# Altium PCB STM32_PCB_Design.PcbDoc
Units mm, origin at the board's own origin, x right, y up, seen from the top; angles counter-clockwise.
Board outline 36 x 36 mm, 4 copper layers (L1 (Signal), L2 (GND), L3 (GND), L4 (Signal)), stack 1.57 mm thick; 35 components, 27 nets, 170 pads, 68 vias.
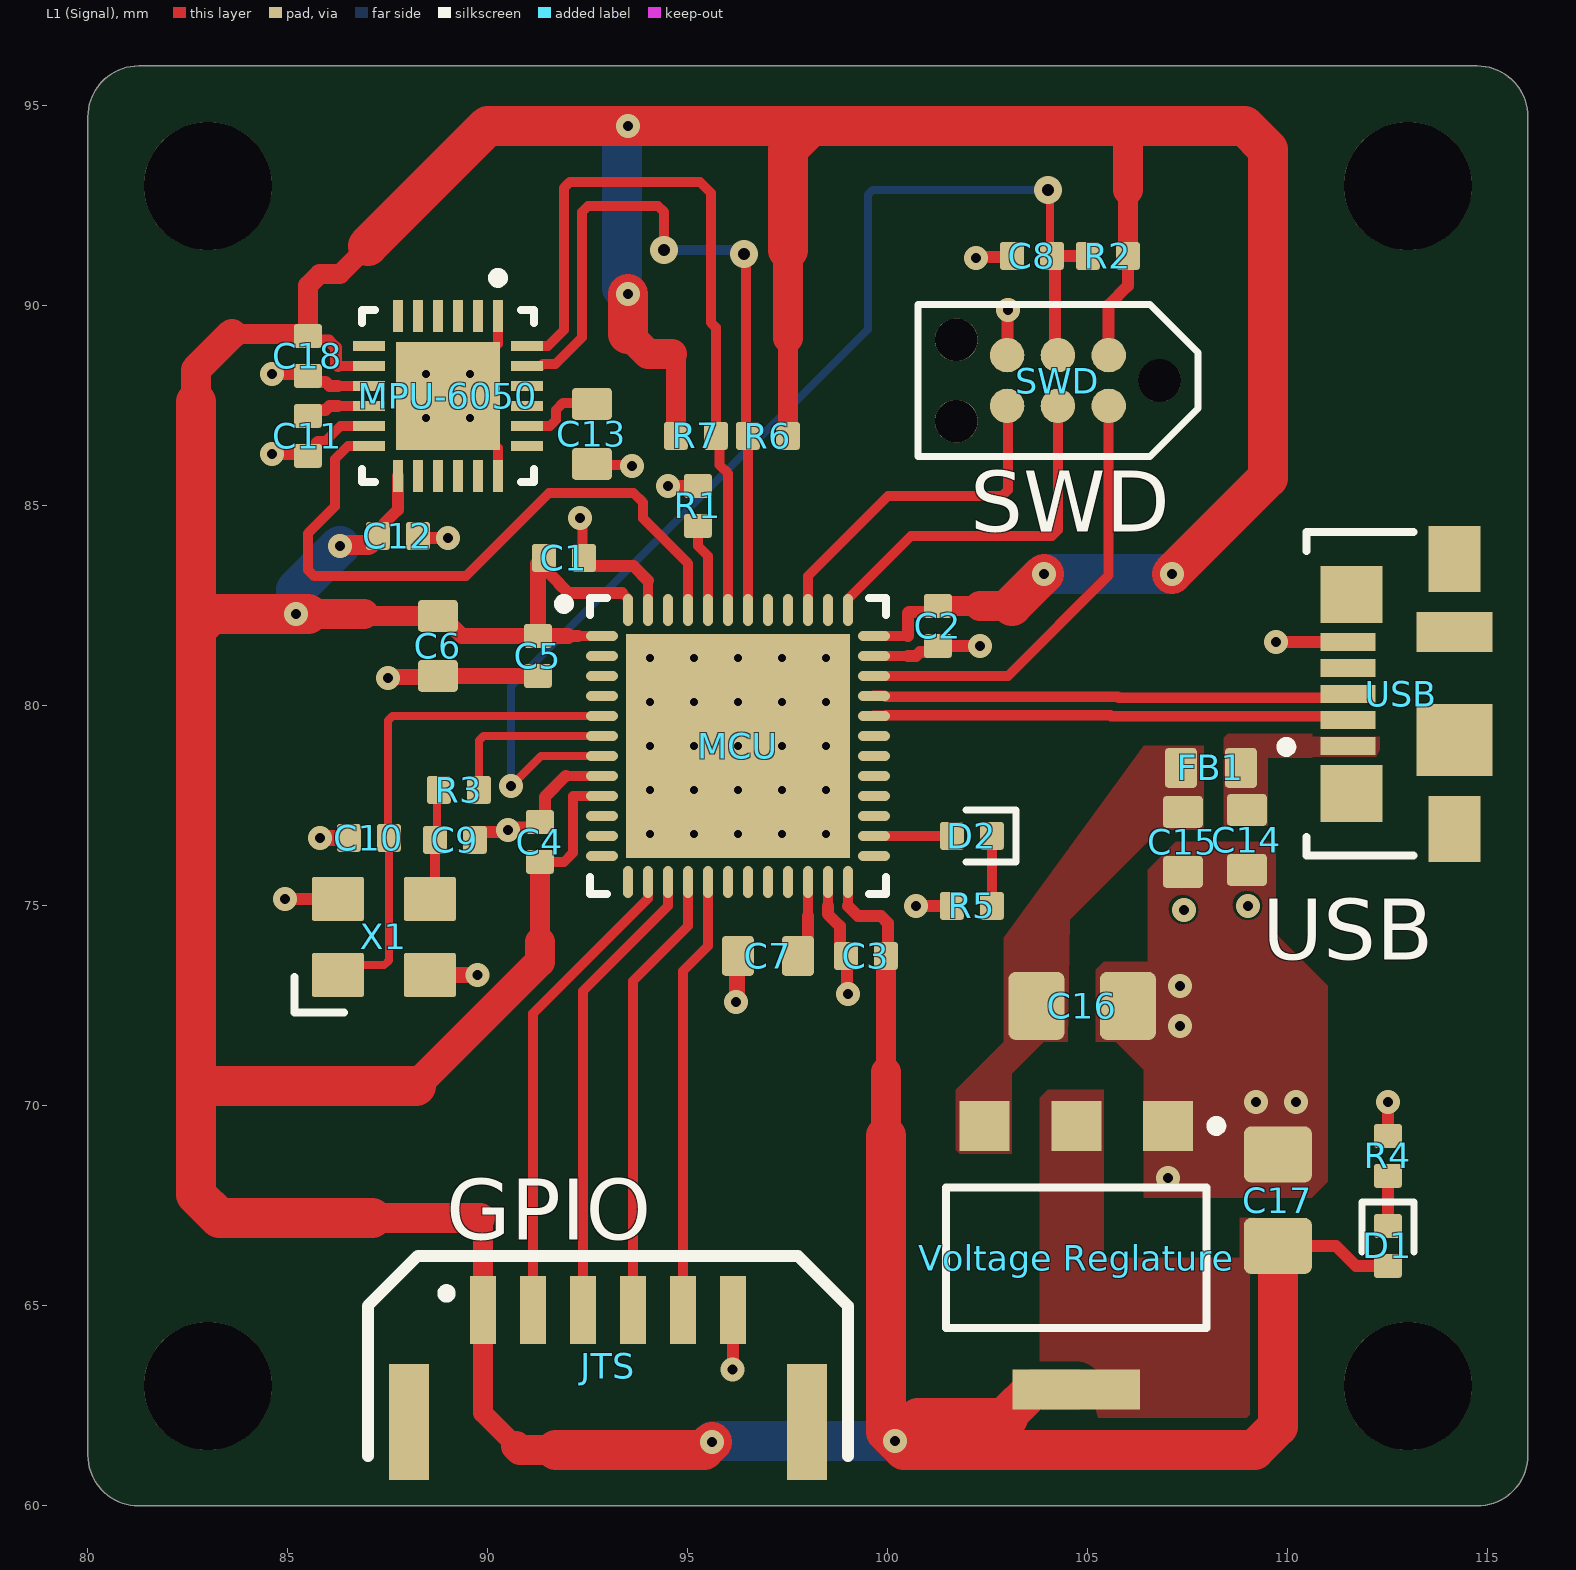
[diagram p0: L1 (Signal) view]
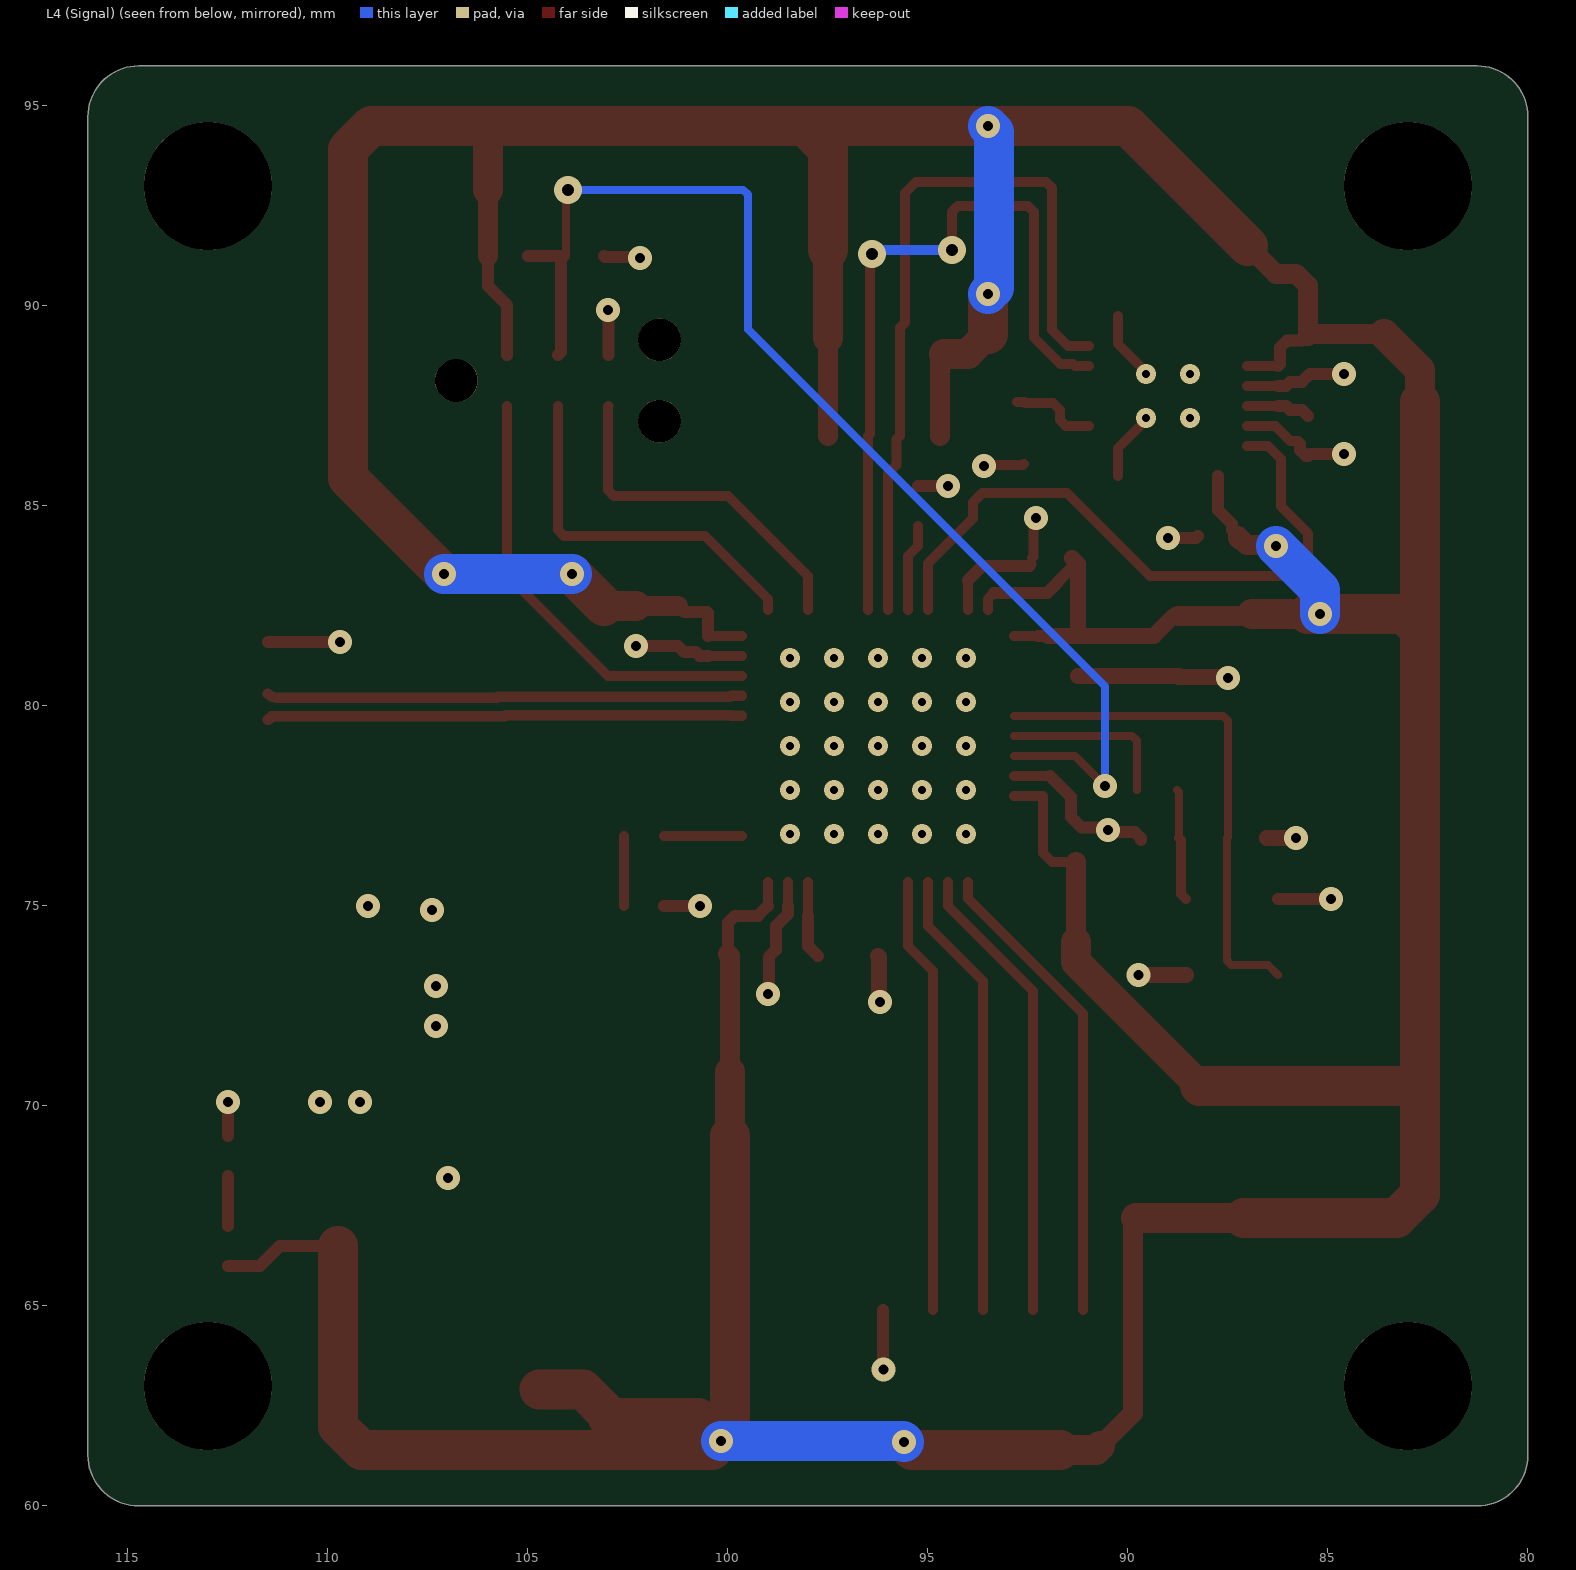
[diagram p1: L4 (Signal) view, seen from below]
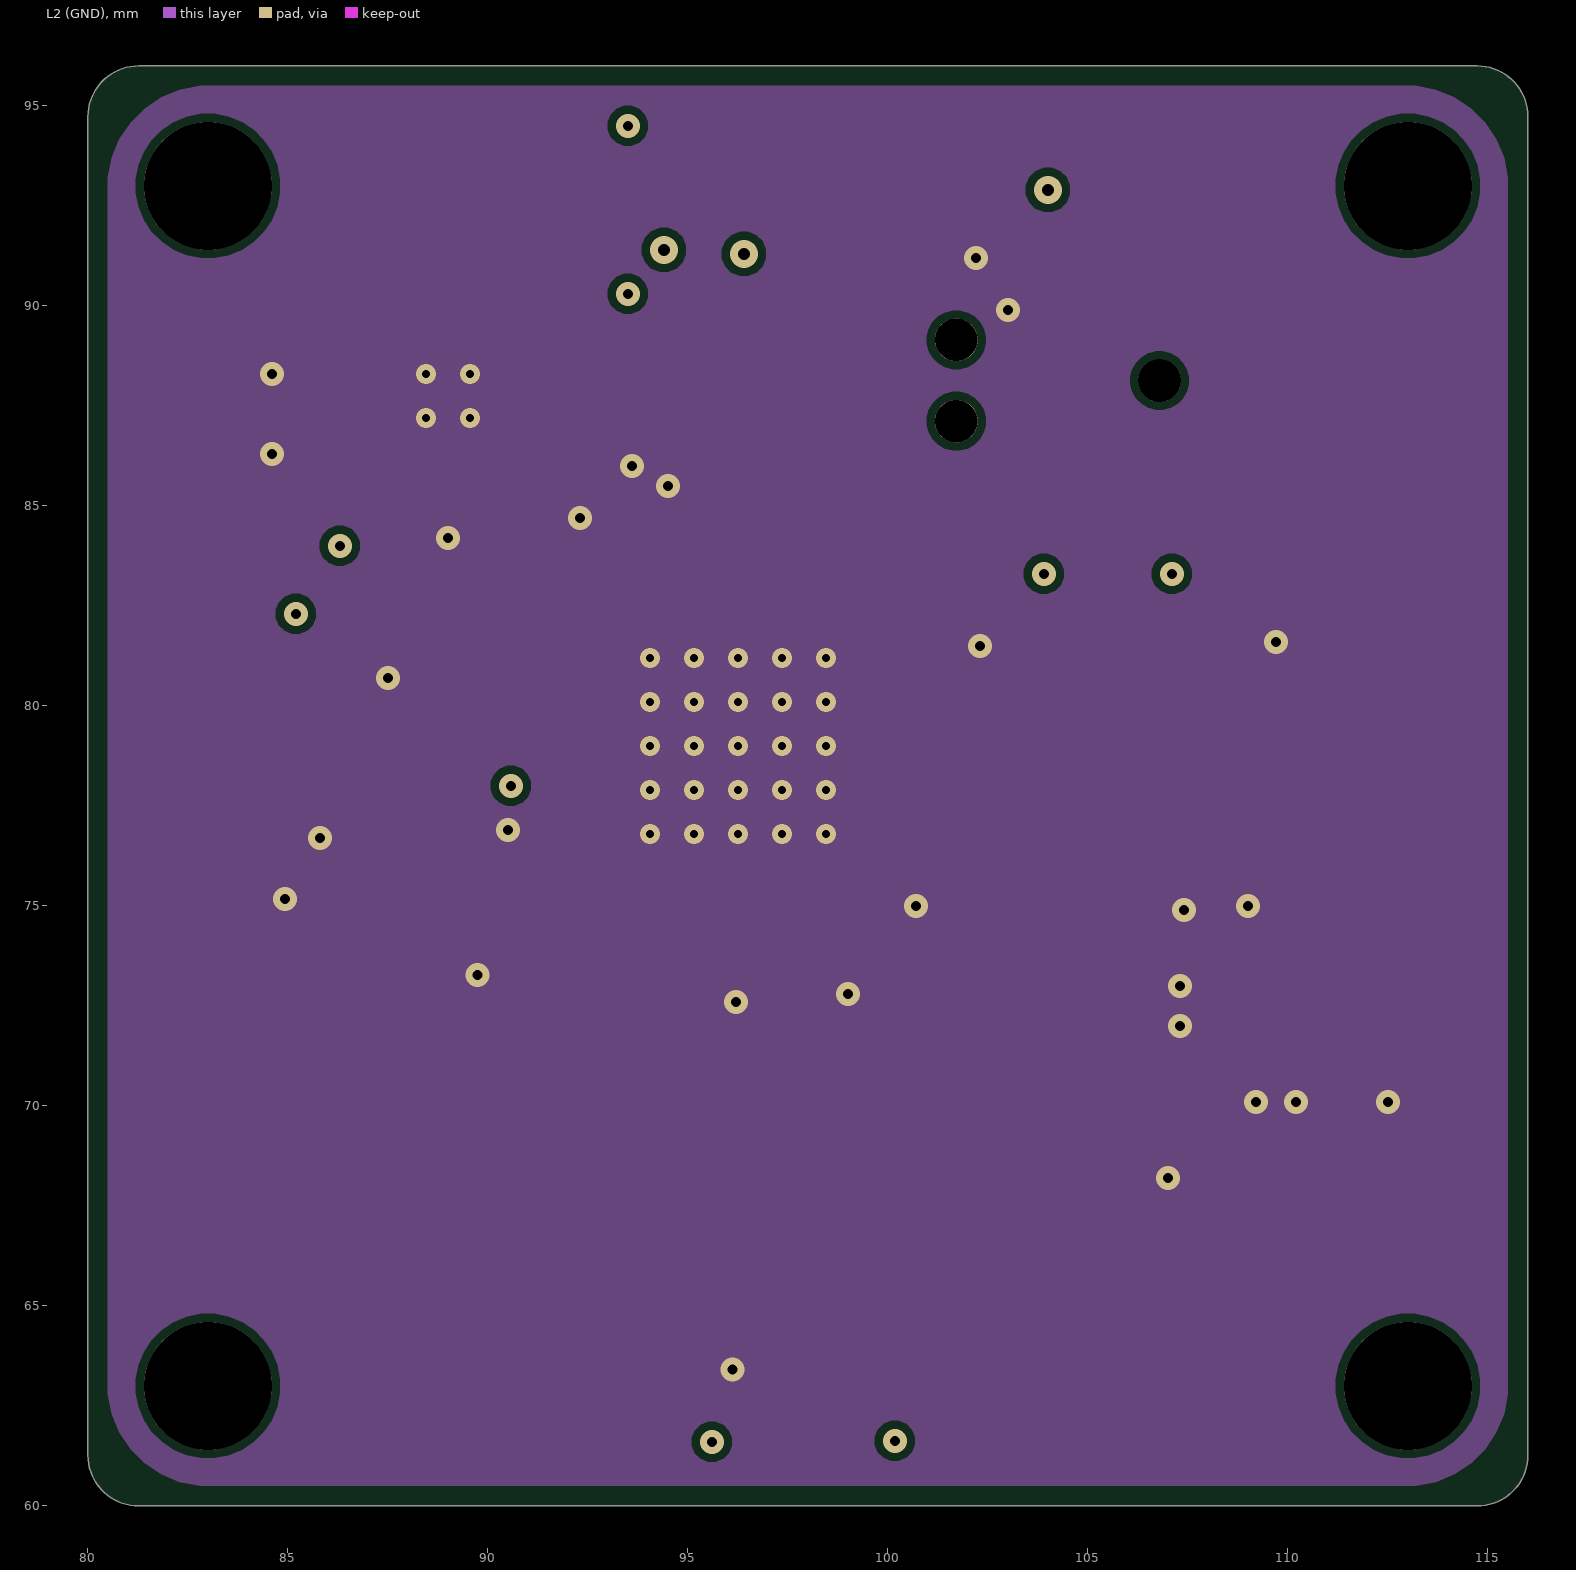
[diagram p2: L2 (GND)]
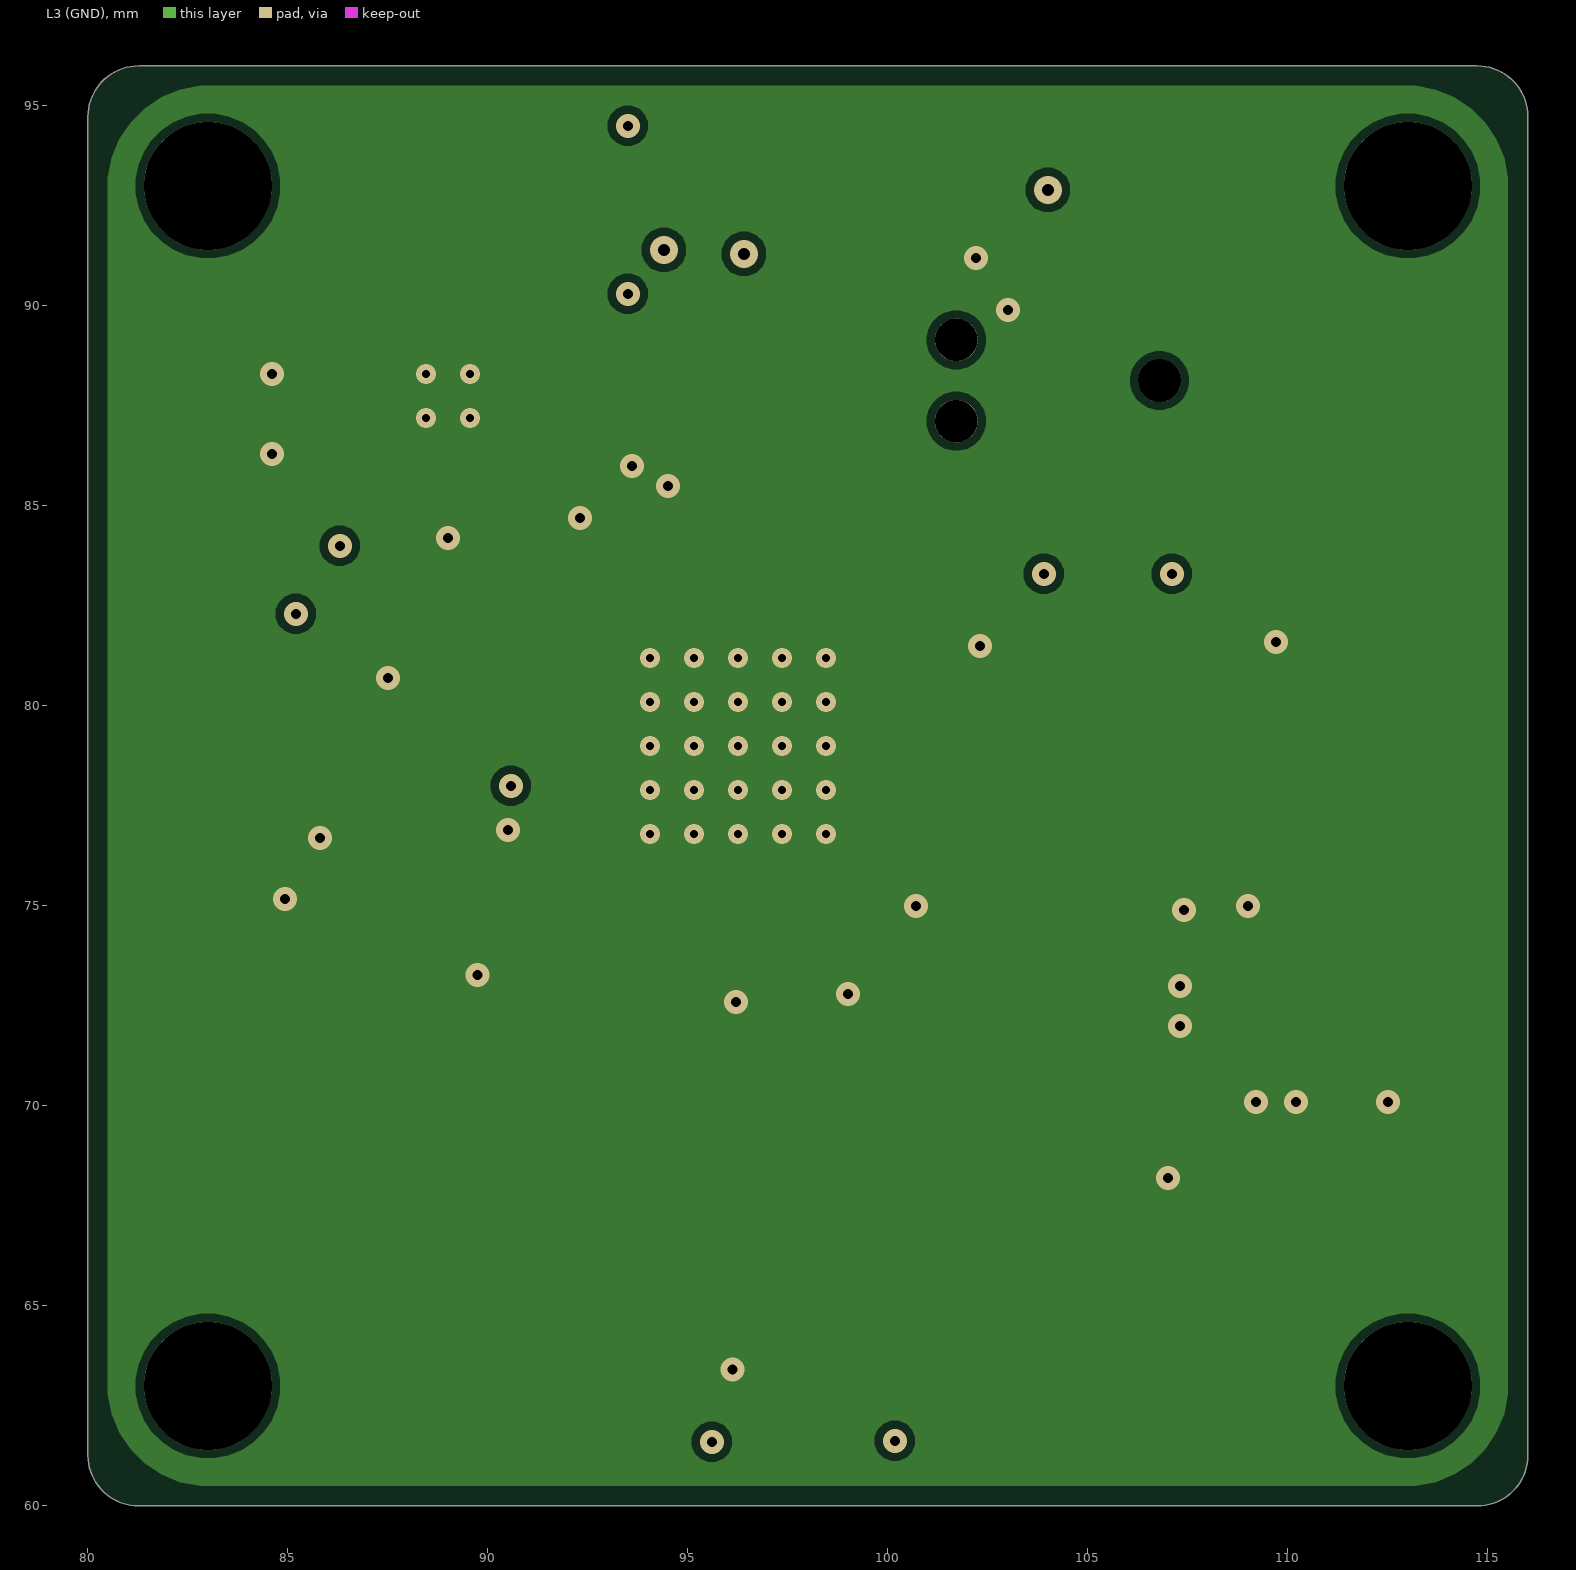
[diagram p3: L3 (GND)]
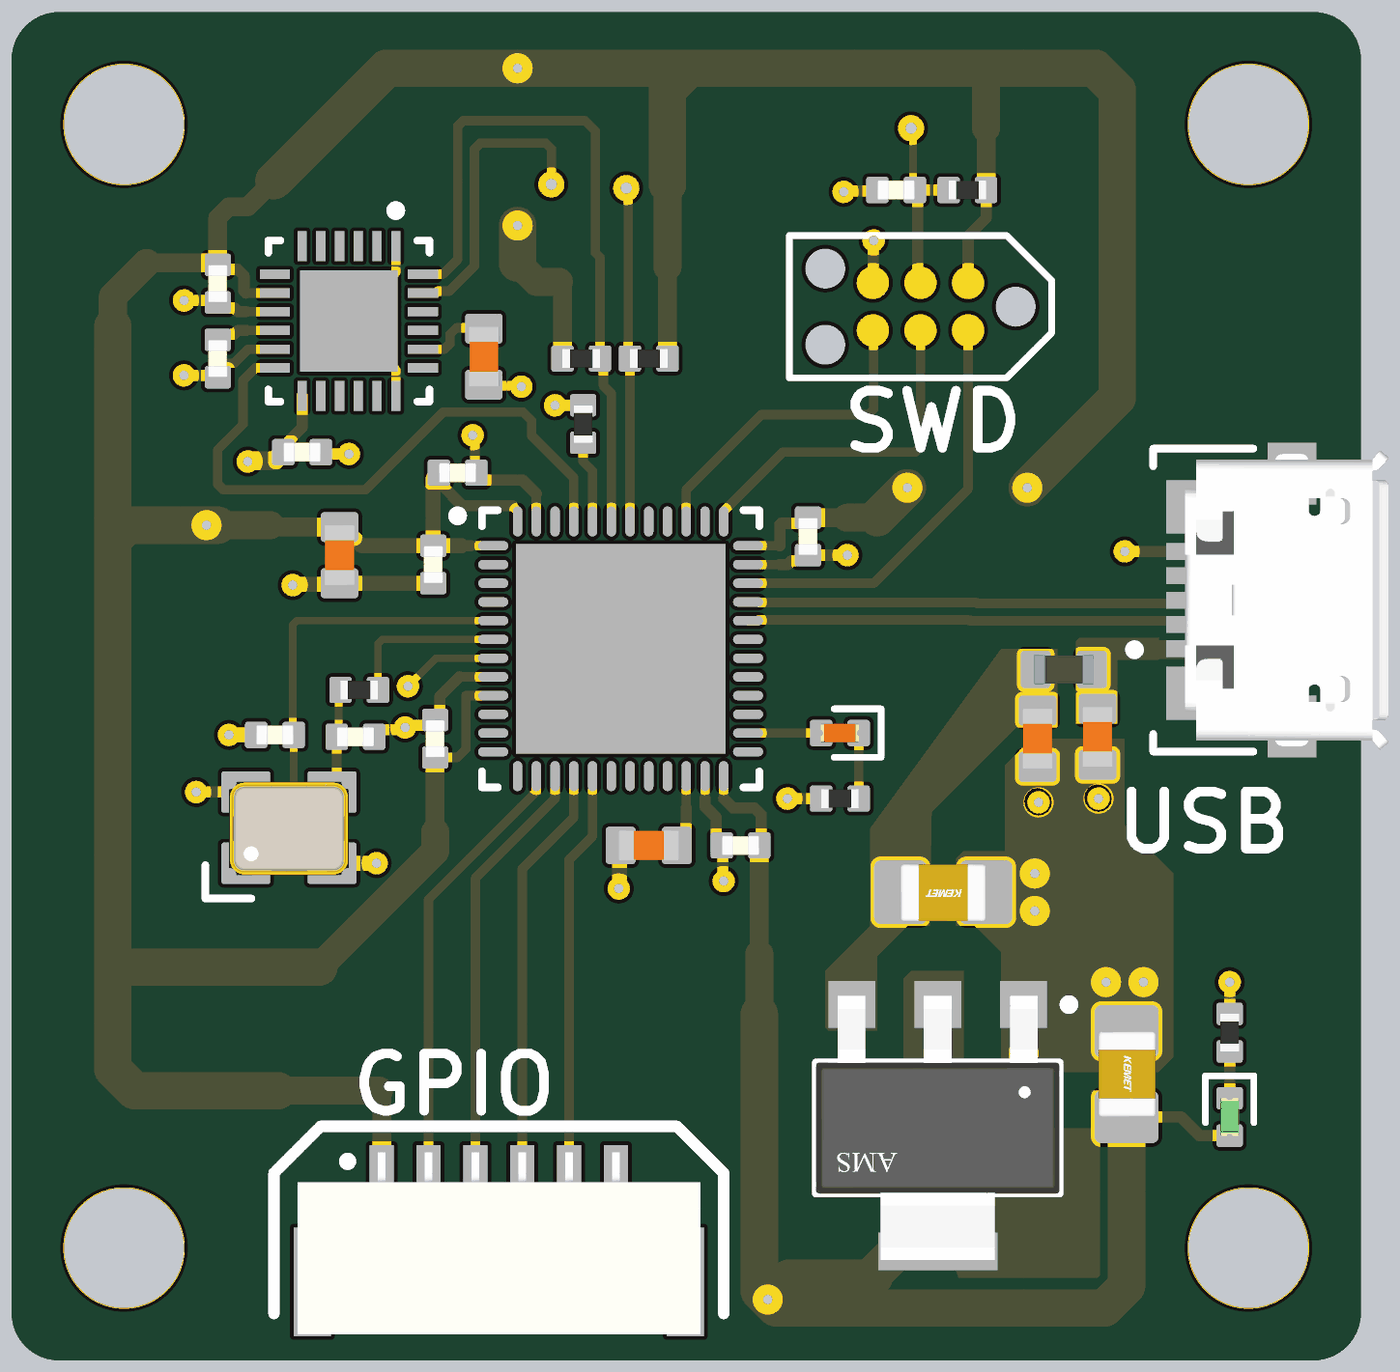
[diagram p4: 3D render of the assembled board from above, using the file's embedded part models]

## Layer stack, top to bottom
Top Solder: solder mask 0.0254, SM-001, Dk 4
L1 (Signal): signal copper 0.035
Dielectric 1: prepreg 0.2, PP-017, Dk 4.6
L2 (GND): signal copper 0.0175
Dielectric 3: core 1.065, Core-039, Dk 4.6
L3 (GND): signal copper 0.0175
Dielectric 5: prepreg 0.2, PP-017, Dk 4.6
L4 (Signal): signal copper 0.035
Bottom Solder: solder mask 0.0254, SM-001, Dk 4

## Board outline
80,61.27 ccw(c81.27,61.27) 81.27,60 114.73,60 ccw(c114.73,61.27) 116,61.27 116,94.73 ccw(c114.73,94.73) 114.73,96 81.27,96 ccw(c81.27,94.73) 80,94.73

## Design rules (kind name [scope] priority, off if disabled: settings)
Clearance [All] p1: gap=0.2 ignorepadtopadclearanceinfootprint=FALSE
DiffPairsRouting [All] p1: maxlimit=0.254 minlimit=0.203 mostfreqgap=0.254 toplayer_maxgap=0.203 toplayer_prefgap=0.203 toplayer_minwidth=0.26 toplayer_maxwidth=0.26 toplayer_prefwidth=0.26 bottomlayer_maxgap=0.203 bottomlayer_prefgap=0.203 bottomlayer_minwidth=0.26 bottomlayer_maxwidth=0.26 bottomlayer_prefwidth=0.26 impedanceprofiledriven=TRUE impedanceprofileid={0C0DE32C-D66B-4248-AC4A-00D76F28ABD3} impedanceprofilevalue=90.000000 maxuncoupledlength=12.7
PolygonConnect [All] p1: connectstyle=Direct reliefconductorwidth=0.254 reliefentries=4 polygonreliefangle="90 Angle" airgapwidth=0.254
RoutingVias [All] p1: holewidth=0.3 width=0.7 viastyle="Through Hole" minholewidth=0.25 minwidth=0.55 maxholewidth=0.4 maxwidth=0.9
SolderMaskExpansion [All] p1: expansion=0.102 istentingtop=FALSE
SupplyNets "Schematic Supply Nets_3" [InNet('+3V3')] p1: voltage=0.000
SupplyNets "Schematic Supply Nets_2" [InNet('GND')] p2: voltage=0.000
SupplyNets "Schematic Supply Nets_1" [InNet('VBUS')] p3: voltage=0.000
SupplyNets "Schematic Supply Nets" [InNet('+5')] p4: voltage=0.000
UnRoutedNet [All] p1: checkbadconnections=TRUE
Width [All] p1: maxlimit=1 minlimit=0.2 preferedwidth=0.3 midlayer1_minwidth=0.254 midlayer1_maxwidth=0.254 midlayer1_prefwidth=0.254 midlayer2_minwidth=0.254 midlayer2_maxwidth=0.254 midlayer2_prefwidth=0.254 minimp=50.000000 maximp=50.000000 favimp=50.000000
28 further rules are at their usual default settings.

## Classes and differential pairs
differential pair class DIFF_USB: USB_D
differential pair USB_D: +USB_D_P -USB_D_N

## Components (designator, comment, footprint, x,y, rotation, side; value= is the part's Value field where it differs from the comment)
C1 "100n" CAP_0402 91.9,83.7 r180 top
C2 "100n" CAP_0402 101.25,82 r90 top
C3 "100n" CAP_0402 99.45,73.75 r0 top
C4 "100n" CAP_0402 91.3,76.6 r270 top
C5 "100n" CAP_0402 91.25,81.25 r90 top
C6 "2.2u" CAP_0603 88.75,81.5 r90 top
C7 "2.2u" CAP_0603 97,73.75 r0 top
C8 "100n" CAP_0402 103.6,91.25 r0 top
C9 "10P" CAP_0402 89.175,76.65 r180 top
C10 "10P" CAP_0402 87.025,76.7 r0 top
C11 "100n" CAP_0402 85.5,86.75 r90 top
C12 "100n" CAP_0402 87.75,84.25 r180 top
C13 "2.2u" CAP_0603 92.6,86.8 r90 top
C14 "2.2u" CAP_0603 108.975,76.65 r90 top
C15 "2.2u" CAP_0603 107.375,76.6 r90 top
C16 "22uf" CAP_0805 104.857,72.5 r180 top
C17 "22uf" CAP_0805 109.75,67.643 r270 top
C18 "100n" CAP_0402 85.5,88.75 r90 top
D1 "GREEN" LED_0402_GREEN 112.5,66.5 r90 top
D2 "RED" LED_0402_RED 102.1,76.75 r0 top
FB1 "120R" FB_0603 108.075,78.45 r180 top
JTS "SM06B-GHS-TB" SM06B-GHS-TB 93,63.5 r0 top
MCU "STM32F411CEU6" STM-UFQFPN48_L 96.25,79 r0 top
MPU-6050 "MPU-6050" IS-QFN-24_V 89,87.75 r270 top
R1 "10K" RES_0402 95.25,85 r270 top
R2 "10K" RES_0402 105.5,91.25 r0 top
R3 "0R" RES_0402 89.275,77.9 r0 top
R4 "1K" RES_0402 112.5,68.75 r270 top
R5 "1K" RES_0402 102.1,75 r0 top
R6 "2K2" RES_0402 97,86.75 r0 top
R7 "2K2" RES_0402 95.2,86.75 r180 top
SWD "TC2030-NL" TC2030-NL-FP 104.25,88.135 r180 top
USB "473460001" FP-473460001-MFG 113.81,80.3 r90 top
"Voltage Reglature" "AMS1117-3.3" FP-AMS1117-IPC_C 104.71,66.205 r270 top
X1 "24MHz" XTAL_3225 87.4,74.225 r0 top

## Footprints (in the part's own frame and the unit in brackets; to place one, negate y for a bottom-side part, rotate by r counter-clockwise, add the part's x,y. Pads: shape width x height; smd on the part's side, far side on the other; paste and mask are expansions set on the pad)
CAP_0402 [mm]
  rrect25% 0.6x0.7 smd: 1(-0.5,0) 2(0.5,0)
  body extent -0.5,-0.26 0.5,0.26, height 0.37
CAP_0603 [mm]
  rrect25% 0.8x1 smd: 1(-0.75,0) 2(0.75,0)
  body extent -0.8,-0.4 0.8,0.4, height 0.51
CAP_0805 [mm]
  rrect25% 1.4x1.7 smd: 1(-1.143,0) 2(1.143,0)
  body extent -1.15,-0.76 1.15,0.79, height 1.01
FB_0603 [mm]
  rrect25% 0.8x1 smd: 1(-0.75,0) 2(0.75,0)
  body extent -0.8,-0.4 0.8,0.4, height 0.81
FP-473460001-MFG [mm]
  rect 0.45x1.38 smd paste+0 mask+0: 1(-1.3,2.31) 2(-0.65,2.31) 3(0,2.31) 4(0.65,2.31) 5(1.3,2.31)
  rect 1.425x1.55 smd paste+0 mask+0: 6(-2.488,2.225) 7(2.488,2.225)
  rect 1.65x1.3 smd paste+0 mask+0: 8(-3.375,-0.35) 11(3.375,-0.35)
  rect 1.8x1.9 smd paste+0 mask+0: 9(-1.15,-0.35)
  rect 1x1.9 smd paste+0 mask+0: 10(1.55,-0.35)
  silkscreen extent -4.05,0.67 4.05,3.97, body extent -4.3,-2.48 4.3,3.45, height 0.25
FP-AMS1117-IPC_C [mm]
  rect 1.25x1.25 smd paste+0 mask+0: 1(-3.295,2.29) 2(-3.295,0) 3(-3.295,-2.29)
  rect 1.004x3.182 smd paste+0 mask+0: 4(3.295,0)
  silkscreen extent -3.42,-3.25 1.75,3.63, body extent -3.9,-3.35 3.9,3.35, height 0.25
IS-QFN-24_V [mm] "QFN, 24-Leads, Body 4x4mm, Pitch 0.5mm, Thermal Pad 2.7x2.6mm"
  rect 0.8x0.25 smd: 1(-2,1.25) 2(-2,0.75) 3(-2,0.25) 4(-2,-0.25) 5(-2,-0.75) 6(-2,-1.25) 13(2,-1.25) 14(2,-0.75) 15(2,-0.25) 16(2,0.25) 17(2,0.75) 18(2,1.25)
  rect 0.25x0.8 smd mask+0.102: 7(-1.25,-1.975) 8(-0.75,-1.975) 9(-0.25,-1.975) 10(0.25,-1.975) 11(0.75,-1.975) 12(1.25,-1.975) 19(1.25,1.975) 20(0.75,1.975) 21(0.25,1.975) 22(-0.25,1.975) 23(-0.75,1.975) 24(-1.25,1.975)
  rect 2.7x2.6 smd: 25(0,0)
  silkscreen extent -3.07,-2.15 2.15,2.15, body extent -2,-2 2,2, height 0.95
LED_0402_GREEN [mm]
  rrect25% 0.6x0.7 smd: A(-0.5,0) K(0.5,0)
  silkscreen extent -0.15,-0.65 1.1,0.65, body extent -0.51,-0.25 0.51,0.25, height 0.45
LED_0402_RED [mm]
  rrect25% 0.6x0.7 smd: A(-0.5,0) K(0.5,0)
  silkscreen extent -0.15,-0.65 1.1,0.65, body extent -0.51,-0.25 0.51,0.25, height 0.45
RES_0402 [mm]
  rrect25% 0.6x0.7 smd: 1(-0.5,0) 2(0.5,0)
  body extent -0.5,-0.25 0.5,0.25, height 0.3
SM06B-GHS-TB [mm]
  rect 0.65x1.7 smd: 1(-3.125,1.4) 2(-1.875,1.4) 3(-0.625,1.4) 4(0.625,1.4) 5(1.875,1.4) 6(3.125,1.4)
  rect 1x2.9 smd: ""(-4.975,-1.4) ""(4.975,-1.4)
  silkscreen extent -6,-2.25 6,2.75, body extent -5.38,-2.8 5.38,2.05, height 4.26
STM-UFQFPN48_L [mm] "QFN, 48-Leads, Body 7.1x7.1mm, Pitch 0.5mm, Thermal Pad 5.6x5.6mm, IPC High Density"
  oval 0.8x0.25 smd: 1(-3.4,2.75) 2(-3.4,2.25) 3(-3.4,1.75) 4(-3.4,1.25) 5(-3.4,0.75) 6(-3.4,0.25) 7(-3.4,-0.25) 8(-3.4,-0.75) 9(-3.4,-1.25) 10(-3.4,-1.75) 11(-3.4,-2.25) 12(-3.4,-2.75) 25(3.4,-2.75) 26(3.4,-2.25) 27(3.4,-1.75) 28(3.4,-1.25) 29(3.4,-0.75) 30(3.4,-0.25) 31(3.4,0.25) 32(3.4,0.75) 33(3.4,1.25) 34(3.4,1.75) 35(3.4,2.25) 36(3.4,2.75)
  oval 0.25x0.8 smd: 13(-2.75,-3.4) 14(-2.25,-3.4) 15(-1.75,-3.4) 16(-1.25,-3.4) 17(-0.75,-3.4) 18(-0.25,-3.4) 19(0.25,-3.4) 20(0.75,-3.4) 21(1.25,-3.4) 22(1.75,-3.4) 23(2.25,-3.4) 24(2.75,-3.4) 37(2.75,3.4) 38(2.25,3.4) 39(1.75,3.4) 40(1.25,3.4) 41(0.75,3.4) 42(0.25,3.4) 43(-0.25,3.4) 44(-0.75,3.4) 45(-1.25,3.4) 46(-1.75,3.4) 47(-2.25,3.4) 48(-2.75,3.4)
  rect 5.6x5.6 smd: 49(0,0)
  silkscreen extent -4.47,-3.7 3.7,3.7, body extent -3.55,-3.55 3.55,3.55, height 0.6
TC2030-NL-FP [mil]
  round 33.98 smd paste-16.99: 1(-50,-25) 2(-50,25) 3(0,-25) 4(0,25) 5(50,-25) 6(50,25)
  round 42.01 hole 42.01 unplated: MH(-100,0) MH(100,-40) MH(100,40)
  silkscreen extent -138,-75 138,75
XTAL_3225 [mm]
  rrect10% 1.3x1.1 smd: 1(-1.15,-0.95) 2(1.15,-0.95) 3(1.15,0.95) 4(-1.15,0.95)
  silkscreen extent -2.23,-1.89 -1,-1, body extent -1.6,-1.28 1.6,1.22, height 0.61

## Part data
C1 C2 C3 C4 C5 C8 C9 C10 C11 C12 C18: library part CAP_0402, "Capacitor SMD 0402"
C6 C7 C13 C14 C15: library part CAP_0603, "Capacitor SMD 0603"
C16 C17: library part CAP_0805, "Capacitor SMD 0805"
D1: library part LED_0402_GREEN, "LED 0402 GREEN SMD"
D2: library part LED_0402_RED, "LED 0402 RED SMD"
FB1: library part FB_0603, "Ferrite Bead SMD 0603"
JTS: "Header Connector 6 Position 1.25MM Pitch SMD Horizontal JST GH", Manufacturer=JST, Manufacturer Part Number=SM06B-GHS-TB
MCU: library part CMP-0243-00165-1, "ARM Cortex-M4 32-bit MCU+FPU, 512 KB Flash, 128 KB RAM, 36 I/Os, 48-Pin UFQFPN, -40 to 85 degC, Tray", I/Os (High Current)=36, Operating Frequency(F) (Processor speed) (MHz)=100, Package Description=UFQFPN48, Package Reference="48-Pin Ultra Thin Fine Pitch Quad Flat No-Lead, 7 x 7 x 0.6 mm Body, 0.5 mm Pitch, Exposed Pad", Supply Voltage(Vcc) min (V)=1.7, ComponentLink1Description="Manufacturer URL", ComponentLink1URL=http://www.st.com/, ComponentLink2Description=Datasheet, ComponentLink2URL=http://www.st.com/st-web-ui/static/active/en/resource/technical/document/datasheet/DM00115249.pdf, Core="ARM Cortex-M4", DatasheetVersion="Rev. 6", FLASH Size (Prog) (kB)=512, Internal RAM Size (kB)=128, Mounting Technology="Surface Mount", Packing=Tray
MPU-6050: library part CMP-1753-00002-2, "3-Axis Gyroscope, Accelerometer and a Digital Motion Processor(TM) (DMP), 2.375 to 3.46 V, -40 to 85 degC, 24-Pin QFN, RoHS, Tape and Reel", Manufacturer=InvenSense, Standard Package=5,000, Category=Sensors,Transducers, Datasheet URL=http://datasheet.octopart.com/MPU-6050-InvenSense-datasheet-14421344.pdf, Datasheet Version="Rev. 3.3, 05/2012", Dynamic Catalog=MPU-6000™Series, Family=Multifunction, Featured Product=MPU-60506-Axis,IntegratedI²CSolution, Manufacturer URL=http://www.invensense.com/, Online Catalog=MPU-6000™Series, Other Names="1428-1007-2 / MPU6050", Output Type=Digital, Sensor Type=MotionTracking, Unit PriceUSD=Digital
R1 R2 R3 R4 R5 R6 R7: library part RES_0402, "Resistor SMD 0402"
SWD: "Tag-Connect No-Solder SWD Debug Connector (No Legs) DO NOT PLACE", Manufacturer=Tag-Connect, Manufacturer Part Number=TC2030-NL-FP
USB: library part CMP-2000-05246-2, "CONN RCPT USB2.0 MICRO B SMD R/A", Current Rating=1.8A, Manufacturer=Molex, Package=0, Temperature="-30°C to +85°C", Temperature Range High=+85°C, Temperature Range Low=-30°C, Voltage Rating=30V, Automotive=No, Category=Conn, ComponentLink2Description=Datasheet, ComponentLink2URL=https://www.molex.com/webdocs/datasheets/pdf/en-us/0473460001_IO_CONNECTORS.pdf, Conn Orientation="Right Angle", Contact Material=Gold,Nickel, Device Class L1=Connectors, Device Class L2="USB Connectors", Device Class L3=unset, Digikey Description="CONN RCPT USB2.0 MICRO B SMD R/A", Footprint Url=https://www.molex.com/pdm_docs/sd/473460001_sd.pdf, Height=2.945mm, Is Female=yes, Lead Free=Yes, Manufacturer Part Number=473460001, Number Of Contacts=5, Octopart=https://octopart.com/47346-0001-molex-7164928, Pitch=0.65mm, RoHS=TRUE, Shielding=true, Usb Standard="USB 2.0"
"Voltage Reglature": library part CMP-209535-000001-1, "LDO Voltage Regulators 1A, 3.3V", Dropout Voltage=1.1V, Manufacturer="Advanced Monolithic Systems", Max Junction Temp=+125°C, Max Power Dissipation=1.2W, Max Supply Voltage=15V, Nominal Supply Current=5mA, Output Current=1A, Output Voltage=3.3V, Package=AMS1117, Temperature="-40°C to +125°C", Temperature Range Low=-40°C, Automotive=No, Category=IC, ComponentLink2Description=Datasheet, ComponentLink2URL=http://www.advanced-monolithic.com/pdf/ds1117.pdf, Device Class L1="Integrated Circuits (ICs)", Device Class L2="Power Management ICs", Device Class L3="Voltage Regulators - Linear", Height=1.8mm, Ipc Land Pattern Name=SOT229P700X180-4, Lead Free=Yes, Manufacturer Part Number=AMS1117-3.3, Number Of Outputs=1, Octopart=https://octopart.com/ams1117-3.3-advanced+monolithic+systems-25899300, Output Type=Fixed, RoHS=TRUE, Standoff Height=0.64mm, Temperature Range High=+125°C
X1: library part TSX-3225_24.0000MF15X-AC, "Crystal SMD 24MHz 10PPM 7pF 3225", Manufacturer=Epson, Manufacturer Part Number="TSX-3225 24.0000MF15X-AC"

## Free pads (board coordinates)
  round 3.2 hole 3.2: 1(83,63) 1(83,93) 1(113,63) 1(113,93)

## Via types
v1: diameter 0.6, hole 0.25, L1 (Signal) to L4 (Signal), 36 vias
v2: diameter 0.5, hole 0.2, L1 (Signal) to L4 (Signal), 29 vias
v3: diameter 0.7, hole 0.3, L1 (Signal) to L4 (Signal), 3 vias

## Nets (pads, with @x,y where several pads share a name; then routed paths per layer and width w, separated by ;. In a path a pad name is that pad's centre, name@x,y a point inside that pad or via, vN(x,y) a via of type N, cw(c..) or ccw(c..) an arc to the next point about the centre after c; other vN are vias at no path point)
+3V3: "Voltage Reglature.2" "Voltage Reglature.4" C1.2 C2.2 C3.2 C4.2 C5.2 C6.2 C12.2 C17.2 C18.2 D1.A JTS.1 MCU.1 MCU.9 MCU.24 MCU.36 MCU.48 MPU-6050.8 MPU-6050.13 R2.2 R6.2 R7.2 SWD.1 | length 191.7
  L1 (Signal) w0.25: 86.25,88.5 MPU-6050.8 ; C4.2 91.9,76.1 92.122,76.322 92.122,77.75 MCU.9 ; 91.775,83.059 91.775,83.075 ; 92.25,81.75 MCU.1 ; 93.354,82.825 93.5,82.679 MCU.48 ; 99,75 MCU.24 ; MCU.36 100.5,81.75
  L1 (Signal) w0.3: C18.2 85.618,89.132 86.024,89.132 86.2,88.956 86.2,88.55 86.25,88.5 ; C12.2 87.4,84.4 87.4,84.55 87.75,84.9 MPU-6050.13 ; C1.2@91.4,83.45 91.775,83.075 ; 91.775,83.059 92.009,82.825 93.354,82.825 ; 92,81.75 92.25,81.75 ; 99,75 99.25,74.75 99.824,74.75 100,74.574 C3.2@100,73.8 ; 100.5,81.75 100.5,82.324 100.526,82.35 101.1,82.35 C2.2 ; SWD.1 105.52,90.02 106,90.5 R2.2 ; C17.2 111.199,66.5 111.699,66 D1.A
  L1 (Signal) w0.4: C6.2 88.85,82.25 89.35,81.75 C5.2 ; C1.2 91.25,83.55 C5.2 ; 92,81.75 C5.2
  L1 (Signal) w0.5: 83.6,89.3 85.45,89.3 C18.2 85.5,90.507 85.793,90.8 86.3,90.8 87,91.5 ; v1(86.3,84) 86.319,84.019 87.019,84.019 87.15,84.15 87.2,84.15 87.25,84.2 C12.2 ; 86.9,82.3 86.95,82.25 C6.2 ; 89.8,67.2 89.875,67.125 JTS.1 89.875,62.325 90.7,61.5 ; 91.3,74.1 C4.2 ; 94.6,88.8 94.7,88.7 R7.2 ; R6.2 97.5,89.2 ; 99.95,70.85 C3.2 C3.2@100,73.8 ; C2.2 102.3,82.5 ; R2.2 106,92.9
  L1 (Signal) w0.75: 82.7,87.6 82.7,88.4 83.6,89.3 ; 85.5,82.3 86.9,82.3 ; 87.1,67.2 89.8,67.2 ; 88.2,70.5 91.3,73.6 91.3,74.1 ; 90.7,61.5 90.8,61.4 91.7,61.4 ; 93.5,89.3 94,88.8 94.6,88.8 ; 97.5,89.2 97.5,91.4 ; 99.95,69.25 99.95,70.85 ; 102.3,82.5 103.1,82.5 ; 106,92.9 106,94.5
  L1 (Signal) w1: 82.7,87.6 82.7,81.9 ; 85.5,82.3 v1(85.2,82.3) 83.1,82.3 82.7,81.9 ; 87,91.5 90,94.5 v1(93.5,94.5) 98.086,94.5 ; 87.1,67.2 83.286,67.2 82.7,67.786 82.7,70.5 ; 88.2,70.5 82.7,70.5 ; 91.7,61.4 95.4,61.4 v1(95.6,61.6) ; 93.5,89.3 v1(93.5,90.3) ; 97.5,91.4 97.5,93.914 98.086,94.5 ; 99.95,69.25 99.95,61.85 v1(100.175,61.625) ; 103.1,82.5 v1(103.9,83.3) ; 104.71,62.91 103.621,62.91 103,62.289 103,62.2 100.75,62.2 v1(100.175,61.625) ; v1(107.1,83.3) 109.5,85.7 109.5,93.914 108.914,94.5 106,94.5 98.086,94.5 ; C17.2 109.75,61.986 109.164,61.4 100.4,61.4 v1(100.175,61.625) ; 82.7,70.5 82.7,81.9
  L4 (Signal) w1: v1(85.2,82.3) 85.2,82.9 v1(86.3,84) ; v1(93.5,90.3) 93.35,90.45 93.35,94.35 v1(93.5,94.5) ; v1(95.6,61.6) 95.625,61.625 v1(100.175,61.625) ; v1(103.9,83.3) v1(107.1,83.3)
+5: "Voltage Reglature.3" C15.2 C16.2 FB1.2
GND: "Voltage Reglature.1" C1.1 C2.1 C3.1 C4.1 C5.1 C6.1 C7.1 C8.1 C9.1 C10.1 C11.1 C12.1 C13.1 C14.1 C15.1 C16.1 C17.1 C18.1 JTS.6 MCU.8 MCU.23 MCU.35 MCU.47 MCU.49 MPU-6050.1 MPU-6050.9 MPU-6050.11 MPU-6050.18 MPU-6050.25 R1.1 R4.1 R5.1 SWD.5 USB.5 X1.2 X1.4 | length 40.3
  L1 (Signal) w0.25: 85.75,86.6 85.775,86.625 85.941,86.625 86.316,87 MPU-6050.11 ; 86.25,88 MPU-6050.9 ; v2(89.55,87.2) 89.55,87.15 90.25,86.45 MPU-6050.18 ; v2(89.55,88.3) 89.55,88.35 90.25,89.05 MPU-6050.1 ; 91.95,78.25 MCU.8 ; v1(92.3,84.7) 92.362,84.638 92.362,83.738 C1.1 ; C1.1@92.412,83.55 C1.1@92.462,83.5 ; C13.1 92.625,86.025 93.575,86.025 v1(93.6,86) ; MCU.47 94,83.136 ; 98.5,75 MCU.23 ; MCU.35 100.5,81.25
  L1 (Signal) w0.3: v1(84.6,86.3) 85.45,86.3 C11.1 85.55,86.25 85.7,86.4 85.7,86.55 85.75,86.6 ; v1(84.6,88.3) 85.45,88.3 C18.1 85.65,88.1 85.943,88.1 86.043,88 86.25,88 ; v1@84.9,75.2 v1(84.925,75.175) X1.4 ; C12.1 88.3,84.2 v1(89,84.2) ; C9.1 89.675,76.693 89.825,76.843 90.443,76.843 90.557,76.957 91.157,76.957 91.428,77.228 91.428,77.728 91.95,78.25 ; C1.1@92.462,83.5 93.636,83.5 94,83.136 ; v1(94.5,85.5) R1.1 ; v1@96.1,63.4 96.125,63.425 JTS.6 ; 98.5,75 98.5,74.793 98.8,74.493 98.8,73.9 98.975,73.725 98.975,72.825 v1(99,72.8) ; 100.5,81.25 100.707,81.25 100.807,81.35 101.1,81.35 C2.1 v1(102.3,81.5) ; v1(100.7,75) R5.1 ; v1(102.2,91.2) 102.225,91.225 103.075,91.225 C8.1 ; SWD.5 102.99,88.78 102.99,89.89 v1(103,89.9) ; v1@107.375,74.925 v1(107.4,74.9) ; v1@108.975,75.025 v1(109,75) ; v1(109.7,81.6) USB.5 ; R4.1 v1(112.5,70.1)
  L1 (Signal) w0.4: v1(85.8,76.7) C10.1 ; v1(87.5,80.7) 87.525,80.725 88.725,80.725 C6.1 C5.1 ; X1.2 v1(89.738,73.275) ; v1(96.2,72.6) 96.225,72.625 96.225,73.725 C7.1
  other v1: 96.113,63.412 107,68.2 109.2,70.1 110.2,70.1 107.3,72 107.3,73 90.5,76.9
  other v2: 94.05,76.8 95.15,76.8 96.25,76.8 97.35,76.8 98.45,76.8 94.05,77.9 95.15,77.9 96.25,77.9 97.35,77.9 98.45,77.9 94.05,79 95.15,79 96.25,79 97.35,79 98.45,79 94.05,80.1 95.15,80.1 96.25,80.1 97.35,80.1 98.45,80.1 94.05,81.2 95.15,81.2 96.25,81.2 97.35,81.2 98.45,81.2 88.45,87.2 88.45,88.3
IMU_CPOUT: C13.2 MPU-6050.20 | length 2.2
  L1 (Signal) w0.25: MPU-6050.20 91.554,87 91.7,87.146 91.7,87.4 91.871,87.571 92.571,87.571 92.6,87.6 C13.2@92.775,87.6
IMU_INT: MCU.45 MPU-6050.12 | length 16.6
  L1 (Signal) w0.25: MPU-6050.12 86.5,86.5 86.175,86.175 86.175,84.991 85.5,84.316 85.5,83.396 85.646,83.25 89.45,83.25 91.525,85.325 93.64,85.325 93.875,85.09 93.875,84.691 95,83.566 MCU.45
IMU_REGOUT: C11.2 MPU-6050.10 | length 1.6
  L1 (Signal) w0.25: 86.25,87.5 MPU-6050.10
  L1 (Signal) w0.3: C11.2 85.65,87.4 85.943,87.4 86.043,87.5 86.25,87.5
IMU_SCL: MCU.42 MPU-6050.23 R6.1 | length 18.9
  L1 (Signal) w0.25: MPU-6050.23 91.323,88.5 91.373,88.55 91.686,88.55 92.35,89.214 92.35,92.35 92.5,92.5 94.254,92.5 94.4,92.354 v3(94.4,91.4) ; v3(96.4,91.3) 96.45,91.25 96.45,86.8 R6.1 MCU.42
  L4 (Signal) w0.25: v3(94.4,91.4) 96.178,91.4 96.278,91.3 v3(96.4,91.3)
IMU_SDA: MCU.43 MPU-6050.24 R7.1 | length 19.1
  L1 (Signal) w0.25: MPU-6050.24 91.5,89 91.9,89.4 91.9,92.954 92.046,93.1 95.3,93.1 95.575,92.825 95.575,89.58 95.7,89.455 R7.1 95.791,86.659 95.791,86.025 96,85.816 MCU.43
LED_PWR_K: D1.K R4.2 | length 1.2
  L1 (Signal) w0.3: D1.K R4.2
MCU_BOOT0: MCU.44 R1.2 | length 2.2
  L1 (Signal) w0.25: R1.2 95.25,84 95.5,83.75 MCU.44
MCU_LED_A: D2.A MCU.26 | length 1.9
  L1 (Signal) w0.25: MCU.26 100.925,76.75 D2.A
MCU_LED_K: D2.K R5.2 | length 1.7
  L1 (Signal) w0.25: R5.2 D2.K
MCU_NRST: C8.2 MCU.7 R2.1 SWD.3 | length 30.7
  L1 (Signal) w0.2: v1(90.575,78) 91.325,78.75 MCU.7 ; v3(104,92.9) 104.05,92.85 104.05,91.3 C8.2
  L1 (Signal) w0.3: SWD.3 104.175,88.845 104.175,91.175 C8.2 R2.1
  L4 (Signal) w0.2: v1(90.575,78) 90.575,80.492 99.5,89.417 99.5,92.783 99.617,92.9 v3(104,92.9)
MCU_OSC_IN: C10.2 MCU.5 X1.1 | length 12.8
  L1 (Signal) w0.2: X1.1 86.492,73.517 87.408,73.517 87.525,73.634 C10.2 87.5,76.725 87.5,79.633 87.617,79.75 MCU.5
MCU_OSC_OUT: MCU.6 R3.2 | length 4.4
  L1 (Signal) w0.2: R3.2 89.775,79.133 89.892,79.25 MCU.6
MCU_PA4: JTS.2 MCU.14 | length 11.9
  L1 (Signal) w0.25: JTS.2 91.125,72.314 94,75.189 MCU.14
MCU_PA5: JTS.3 MCU.15 | length 11.6
  L1 (Signal) w0.25: JTS.3 92.375,72.875 94.5,75 MCU.15
MCU_PA6: JTS.4 MCU.16 | length 11.3
  L1 (Signal) w0.25: JTS.4 93.625,73.125 95,74.5 MCU.16
MCU_PA7: JTS.5 MCU.17 | length 11
  L1 (Signal) w0.25: JTS.5 94.875,73.375 95.5,74 MCU.17
MCU_SWCLK: MCU.37 SWD.4 | length 9.3
  L1 (Signal) w0.25: MCU.37 99,82.675 100.575,84.25 104.104,84.25 104.25,84.396 SWD.4
MCU_SWDIO: MCU.34 SWD.2 | length 11.1
  L1 (Signal) w0.25: MCU.34 103,80.75 105.52,83.27 SWD.2
MCU_SWO: MCU.39 SWD.6 | length 8.9
  L1 (Signal) w0.25: MCU.39 98,83.25 100,85.25 102.854,85.25 103,85.396 103,87.48 SWD.6
MCU_VCAP1: C7.2 MCU.22 | length 2
  L1 (Signal) w0.25: 98,74.75 MCU.22
  L1 (Signal) w0.3: C7.2 98,74 98,74.75
USB_D_N: MCU.32 USB.2 | length 12
  L1 (Signal) w0.26: MCU.32 99.915,79.75 cw(c99.959,79.706) 99.959,79.768 105.535,79.768 cw(c105.535,79.726) 105.566,79.756 ccw(c105.596,79.786) 105.596,79.743 111.275,79.743 cw(c111.275,79.425) USB.2 USB.2@111.407,79.743
USB_D_P: MCU.33 USB.3 | length 11.9
  L1 (Signal) w0.26: MCU.33 99.915,80.25 ccw(c99.959,80.294) 99.959,80.232 105.727,80.232 cw(c105.727,80.189) 105.757,80.219 ccw(c105.788,80.249) 105.788,80.207 111.275,80.207 ccw(c111.275,80.525) USB.3@111.5,80.3
VBUS: C14.2 FB1.1 USB.1
XTAL_IN: C9.2 R3.1 X1.3 | length 2.8
  L1 (Signal) w0.2: C9.2@88.725,76.7 88.725,77.85 R3.1
  L1 (Signal) w0.25: X1.3 88.675,75.3 C9.2 C9.2@88.725,76.7
pads on no net: JTS. MCU.2 MCU.3 MCU.4 MCU.10 MCU.11 MCU.12 MCU.13 MCU.18 MCU.19 MCU.20 MCU.21 MCU.25 MCU.27 MCU.28 MCU.29 MCU.30 MCU.31 MCU.38 MCU.40 MCU.41 MCU.46 MPU-6050.2 MPU-6050.3 MPU-6050.4 MPU-6050.5 MPU-6050.6 MPU-6050.7 MPU-6050.14 MPU-6050.15 MPU-6050.16 MPU-6050.17 MPU-6050.19 MPU-6050.21 MPU-6050.22 SWD.MH USB.4 USB.6 USB.7 USB.8 USB.9 USB.10 USB.11

## Polygon pours and split planes (outlines as drawn)
+3V3 on L1 (Signal) "+3V3_L01_P003" (solid, pour order 3): 108.8,66.2 105.5,66.2 105.4,66.3 105.4,70.4 104,70.4 103.8,70.2 103.8,63.5 103,63.5 103,62.2 110.7,62.2 110.7,67.2 108.8,67.2
GND on L1 (Signal) "GND_L01_P011" (solid, pour order 11): 110.6,67.7 111,68.1 111,73 109.7,74.3 109.7,76.6 107.2,76.6 106.5,75.9 106.5,73.6 105.4,73.6 105.2,73.4 105.2,71.6 105.7,71.6 106.4,70.9 106.4,67.7 106.9,67.7 106.4,67.7 106.9,67.7
+5 on L1 (Signal) "+5_L01_P002" (solid, pour order 2): 102.9,71.6 101.7,70.4 101.7,68.9 101.8,68.8 103.1,68.8 103.1,70.8 103.9,71.6 104.5,71.6 104.55,74.65 106.8,76.9 107.9,76.9 107.9,79 106.8,79 106.4,79 102.9,74.2 102.9,73.9
VBUS on L1 (Signal) "VBUS_L01_P001" (solid, pour order 1): 108.4,77 109.5,77 109.5,78.7 112.2,78.7 112.3,78.9 112.3,79 112.3,79.3 108.5,79.3 108.4,79.2
GND on L2 (GND) "GND_L02_P009" (solid, pour order 9): 80.5,63.04 ccw(c83.04,63.04) 83.04,60.5 112.96,60.5 ccw(c112.96,63.04) 115.5,63.04 115.5,92.96 ccw(c112.96,92.96) 112.96,95.5 83.04,95.5 ccw(c83.04,92.96) 80.5,92.96
GND on L3 (GND) "GND_L03_P010" (solid, pour order 10): 80.5,63.04 ccw(c83.04,63.04) 83.04,60.5 112.96,60.5 ccw(c112.96,63.04) 115.5,63.04 115.5,92.96 ccw(c112.96,92.96) 112.96,95.5 83.04,95.5 ccw(c83.04,92.96) 80.5,92.96

## Silkscreen, mask and mechanical layers (free items; w line width, h text height)
Top Overlay:
  text "SWD" at 102.054,84.354 h1.52
  text "USB" at 109.354,73.654 h1.52
  text "GPIO" at 88.954,66.654 h1.52
Mechanical 1:
  lines w0.3: 80,61.27 ccw(c81.27,61.27) 81.27,60 83,60 114.73,60 ccw(c114.73,61.27) 116,61.27 116,94.73 ccw(c114.73,94.73) 114.73,96 81.27,96 ccw(c81.27,94.73) 80,94.73 80,61.27

## Text inside footprints (layer, text, board x,y; h text height)
D1: Mechanical 13 "+" at 111.992,64.617 h0.5 r90
D2: Mechanical 13 "+" at 100.217,77.258 h0.5